# EAGLE board GenericFabBoardFTDI (EAGLE 5.03)
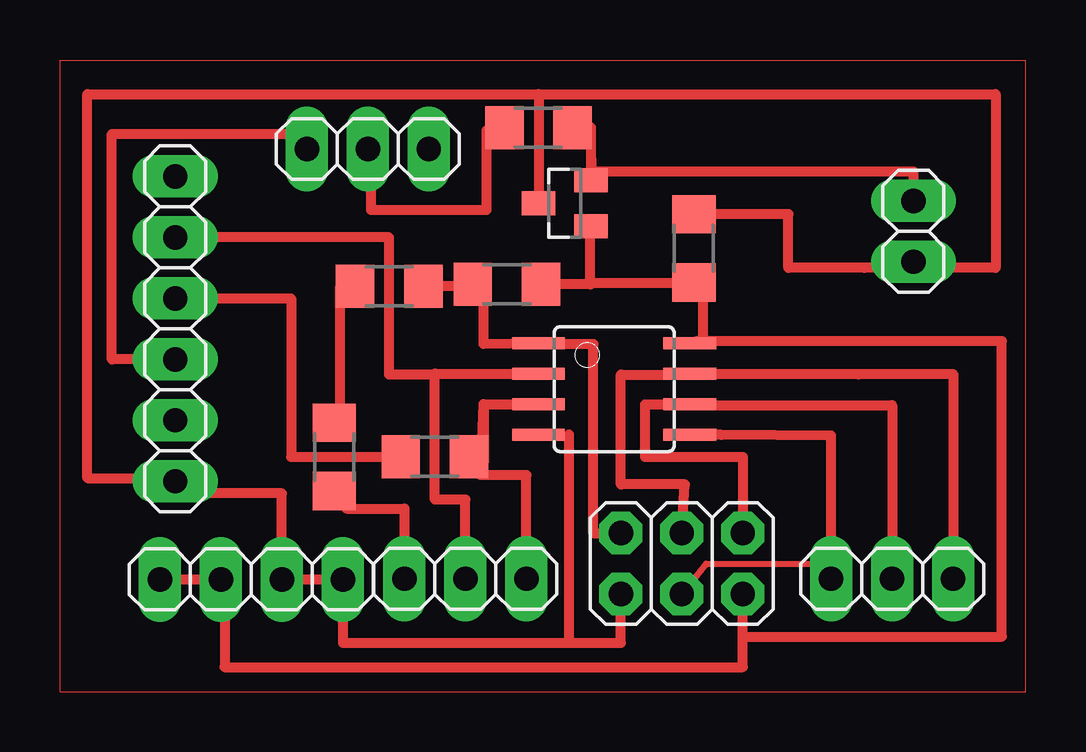
[diagram p0: board, top side]

No outline drawn. Coordinates in mm, seen from the top.
Copper layers (1*16): Top 0.035mm / dielectric 1.5mm / Bottom 0.035mm
Design rules "default *": minimum track width 10mil, minimum drill 24mil, track to track 8mil, track to pad 8mil, pad to pad 8mil, via to via 8mil, smd to smd 8mil, copper to edge 40mil, drill to drill 8mil, minimum pad ring 15mil, minimum via ring 8mil, stop-mask expansion 4mil, vias tented up to drill 0mil, thermal gap 10mil

## Footprints (pad centres in the part's own frame; a part is rotated, then mirrored left to right if it is on the bottom)
1206 = smd 1.6 x 1.803: 1 -1.422,0; 2 1.422,0
SOIC8 = smd 0.5 x 2.2: 1 -1.905,-3.154; 2 -0.645,-3.154; 3 0.625,-3.154; 4 1.895,-3.154; 5 1.905,3.154; 6 0.635,3.154; 7 -0.635,3.154; 8 -1.905,3.154
SOT23 = smd 1 x 1.4: 1 -0.95,-1.1; 2 0.95,-1.1; 3 0,1.1
1X06 = drill 1.016 long: 1 -6.35,0; 2 -3.81,0; 3 -1.27,0; 4 1.27,0; 5 3.81,0; 6 6.35,0
1X04 = drill 1.016 long: 1 -3.81,0; 2 -1.27,0; 3 1.27,0; 4 3.81,0
2X03 = drill 1.016 octagon: 1 -2.54,-1.27; 2 -2.54,1.27; 3 0,-1.27; 4 0,1.27; 5 2.54,-1.27; 6 2.54,1.27
1X03 = drill 1.016 long: 1 -2.54,0; 2 0,0; 3 2.54,0
1X02 = drill 1.016 long: 1 -1.27,0; 2 1.27,0

## Placement (x,y rotation side)
C1  3.3uF  [1206]  26.29,17.96 270 top
IC1  [SOIC8]  22.96,12.09 270 top
IC2  5V  [SOT23]  20.9,19.84 90 top
JP1  [1X06]  4.67,14.61 90 top
JP2  [1X04]  7.85,4.17 0 top
JP3  [2X03]  25.78,4.83 180 top
JP4  [1X03]  12.7,22.1 180 top
JP5  [1X03]  34.54,4.19 0 top
JP6  [1X03]  16.76,4.19 0 top
JP7  [1X02]  35.43,18.67 90 top
R1  10k  [1206]  18.49,16.46 180 top
R2  0 ohms  [1206]  15.49,9.27 0 top
R3  0 ohms  [1206]  11.3,9.27 90 top
R4  0 ohms  [1206]  13.59,16.38 0 top
R6  0 ohms  [1206]  19.81,22.99 0 top

## Library data of the parts
C1 IC1 IC2 R1-R4 R6 = ng
JP1-JP7 = pinhead

## Nets
GND: C1.1 IC1.4 IC2.3 JP1.1 JP2.3 JP2.4 JP3.6 JP7.1
N$1: C1.2 IC1.8 IC2.1 JP2.1 JP2.2 JP3.2 R1.1
N$2: IC1.2 JP1.5 JP6.2
N$3: IC1.6 JP3.1 JP5.2
N$4: IC1.1 JP3.5 R1.2 R4.2
N$6: JP4.2 R6.1
N$8: R3.2 R4.1
N$11: IC1.7 JP3.3 JP5.3
N$12: IC1.5 JP3.4 JP5.1
N$15: IC1.3 JP6.3 R2.2
N$16: JP1.3 JP4.3
N$17: JP1.4 R2.1
N$18: IC2.2 JP7.2 R6.2
N$19: JP6.1 R3.1

## Tracks (layer width: path | path; a pad name or v marks a point on that pad's centre or on a via)
GND
  Top 0.254: 21.08,10.2 IC1.4
  Top 0.406: 21.08,1.52 23.24,1.52 JP3.6 | 21.08,1.52 21.08,10.2 | 21.08,1.52 11.66,1.52 JP2.4 JP2.3 9.12,7.75 4.67,7.75 JP1.1 4.67,8.38 1.02,8.38 1.02,24.38 19.81,24.38 | C1.1 30.23,19.38 30.23,17.14 33.4,17.14 | IC2.3 19.81,20.22 19.81,24.38 | 19.81,24.38 38.86,24.38 38.86,17.14 33.4,17.14 | 33.4,17.14 JP7.1
N$1
  Top 0.406: IC1.8 26.42,13.99 26.42,14.1 26.67,14.1 | 26.67,14.1 39.12,14.1 39.12,1.78 28.32,1.78 | 28.32,1.78 JP3.2 | JP2.2 JP2.1 6.73,4.17 6.73,0.51 28.32,0.51 28.32,1.78 | IC2.1 21.97,19.14 21.97,16.64 | 21.97,16.64 21.97,16.51 26.29,16.51 C1.2 26.67,16.54 26.67,14.1 | R1.1 21.97,16.46 21.97,16.64
N$2
  Top 0.406: JP6.2 16.76,7.49 15.49,7.49 15.49,12.7 | JP1.5 13.59,18.41 13.59,12.7 15.49,12.7 | IC1.2 15.49,12.73 15.49,12.7
N$3
  Top 0.406: JP3.1 28.32,9.27 24.26,9.27 24.26,11.46 IC1.6 26.12,11.43 34.54,11.43 JP5.2
N$4
  Top 0.406: JP3.5 22.1,6.1 22.1,13.97 19.81,13.97 IC1.1 17.52,13.97 17.52,16.46 R1.2 17.07,16.38 R4.2
N$6
  Top 0.406: JP4.2 12.83,22.1 12.83,19.56 17.65,19.56 17.65,22.86 18.39,22.86 R6.1
N$8
  Top 0.406: R3.2 11.56,10.69 11.56,16.38 R4.1
N$11
  Top 0.406: IC1.7 37.08,12.72 JP5.3 | IC1.7 33.15,12.72 33.15,12.7 | JP3.3 25.91,8.13 23.24,8.13 23.24,12.7 26.12,12.7 IC1.7
N$12
  Top 0.254: JP3.4 26.8,4.83 32,4.83
  Top 0.406: IC1.5 27.43,10.19 32,10.16 32,4.83 JP5.1
N$14
  Top 0: -0.13,-0.51 40.11,-0.51 40.11,25.81 -0.13,25.81 -0.13,-0.51
N$15
  Top 0.406: 19.3,4.06 JP6.3 19.3,8.51 17.4,8.51 17.53,11.46 | 17.53,11.46 IC1.3 | R2.2 17.53,9.02 17.53,11.46
N$16
  Top 0.406: JP1.3 2.03,13.34 2.03,22.73 10.16,22.73 JP4.3
N$17
  Top 0.406: R2.1 9.5,9.27 9.5,15.88 JP1.4
N$18
  Top 0.406: R6.2 22,22.99 22,21.72 | IC2.2 22,21.72 | JP7.2 35.43,21.17 22,21.17 22,21.72
N$19
  Top 0.406: R3.1 11.81,7.85 11.81,7.11 14.22,7.11 JP6.1